# Altium PCB TESTER_REMOTE_01.PcbDoc
Units mil, origin at the board's own origin, x right, y up, seen from the top; angles counter-clockwise.
Board outline 6191.28 x 3341.28 mil, 2 copper layers (Top Layer, Bottom Layer); 126 components, 81 nets, 454 pads, 71 vias.
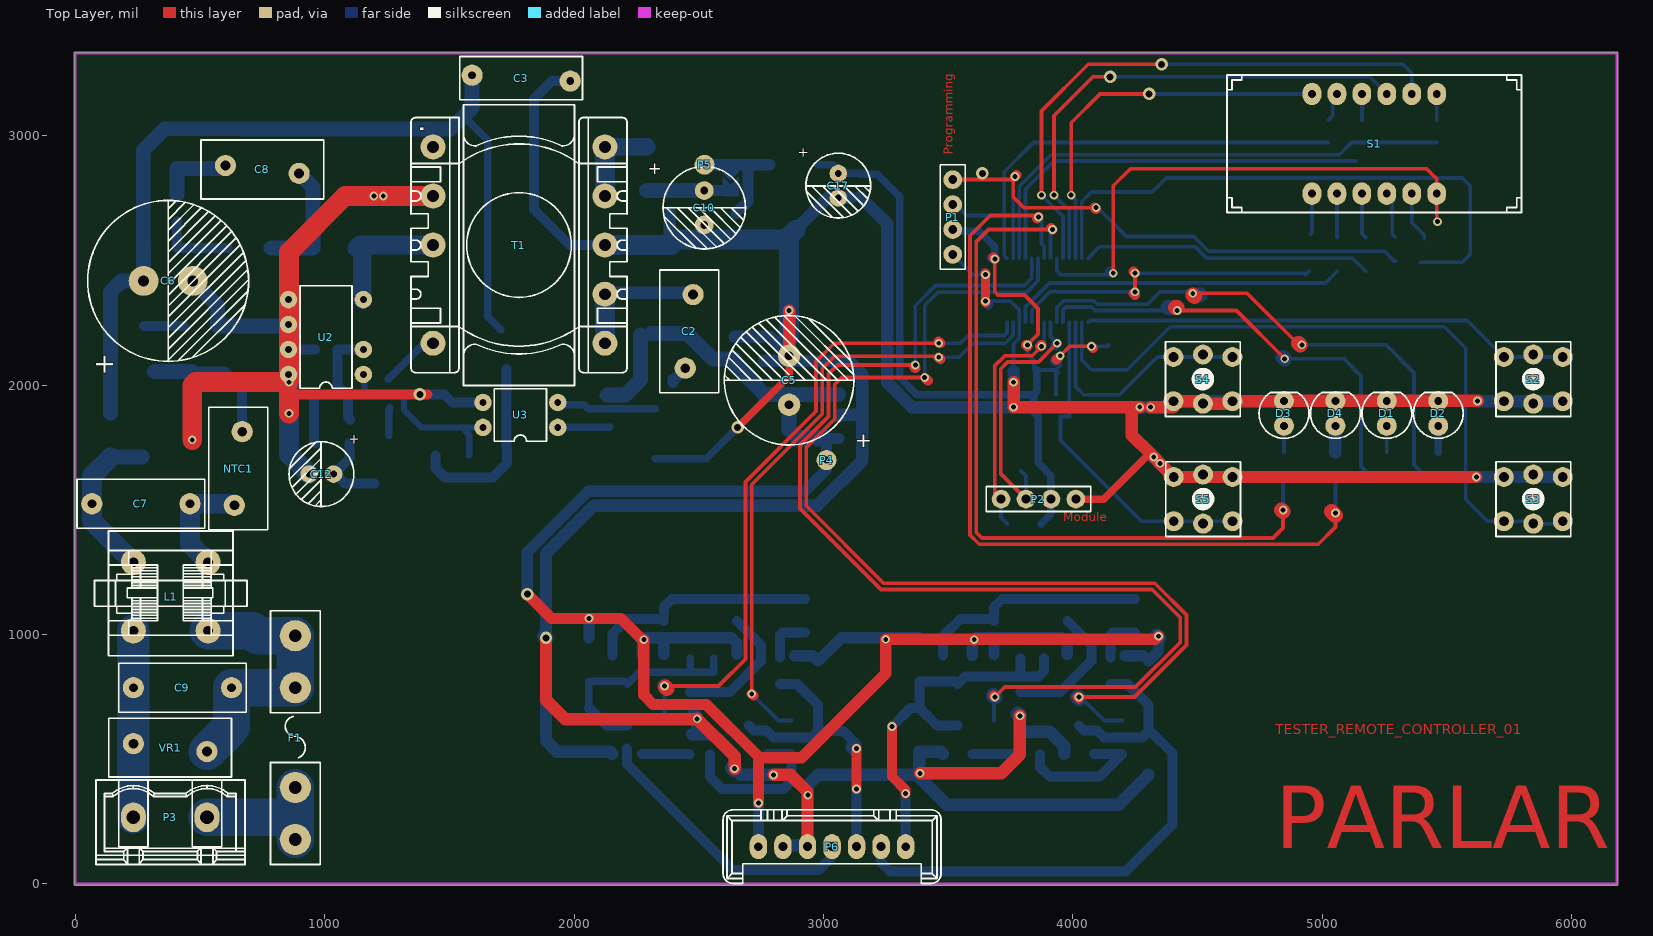
[diagram p0: Top Layer view]
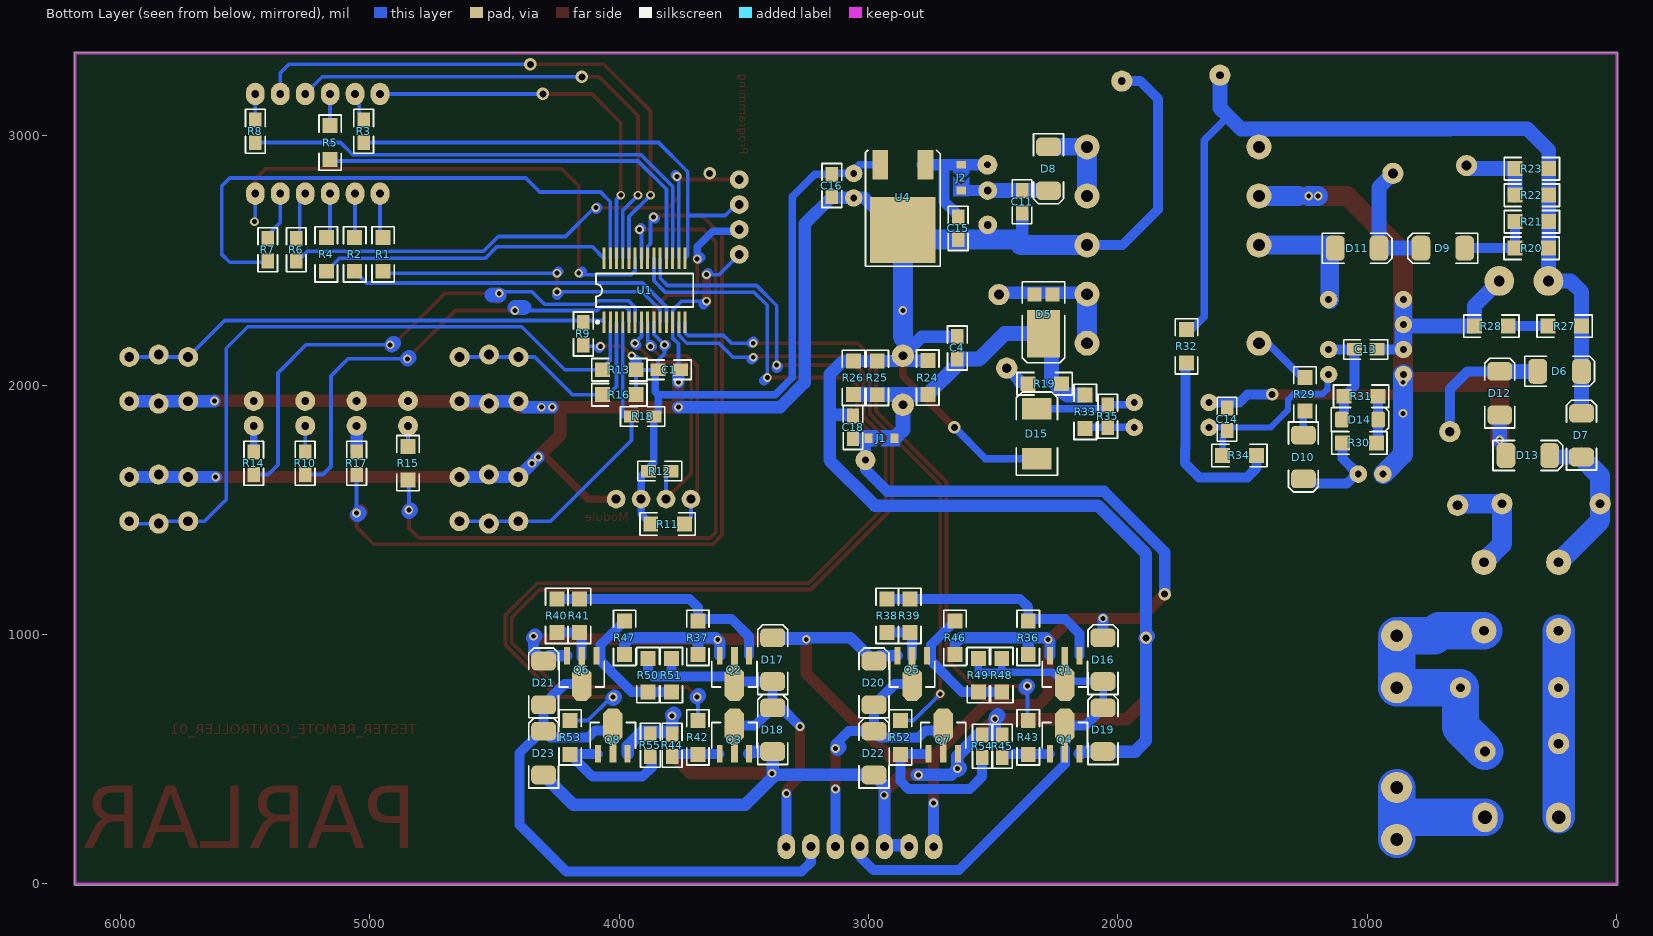
[diagram p1: Bottom Layer view, seen from below]

## Layer stack, top to bottom
Top Solder: solder mask 0.4, Solder Resist, Dk 3.5
Top Layer: signal copper 1.4
Dielectric 1: dielectric 12.6, FR-4, Dk 4.8
Bottom Layer: signal copper 1.4
Bottom Solder: solder mask 0.4, Solder Resist, Dk 3.5

## Board outline
-5.01,0 -5.02,3331.25 cw(c0,3331.25) 0,3336.26 6181.25,3336.26 cw(c6181.25,3331.25) 6186.26,3331.25 6186.27,0 cw(c6181.25,0) 6181.25,-5.01 0,-5.01 cw(c0,0)

## Design rules (kind name [scope] priority, off if disabled: settings)
AssemblyTestPointUsage [All] p1 off:
AssemblyTestpoint [All] p1 off: testpointundercomponent=TRUE minsize=40 maxsize=100 preferedsize=60 minholesize=0 maxholesize=40 preferedholesize=32 testpointgrid=1 usegrid=TRUE gridtolerance=0.01 allowsidetop=TRUE allowsidebottom=TRUE
Clearance Keep [OnLayer('Keep-Out Layer')] p1: gap=10 ignorepadtopadclearanceinfootprint=FALSE except(0: Arc-Hole Track-Hole SMDPad-Hole THPad-Hole Via-Hole Fill-Hole Poly-Hole Region-Hole Text-Hole)
Clearance "OTHER - OTHER" [NOT((InNetClass('220') OR InNetClass('Hline') OR InNetClass('HVDC') OR InNetClass('MV') OR InNet('DCLINK-'))) vs NOT((InNetClass('220') OR InNetClass('Hline') OR InNetClass('HVDC') OR InNetClass('MV') OR InNet('DCLINK-')))] p2: gap=10 ignorepadtopadclearanceinfootprint=FALSE
Clearance "DCL- - OTHER" [InNet('DCLINK-') vs NOT((InNetClass('220') OR InNetClass('Hline') OR InNetClass('HVDC') OR InNetClass('MV') OR InNet('DCLINK-')))] p3: gap=150 ignorepadtopadclearanceinfootprint=FALSE except(0: Arc-Hole Track-Hole SMDPad-Hole THPad-Hole Via-Hole Fill-Hole Poly-Hole Region-Hole Text-Hole)
Clearance MV-OTHER [InNetClass('MV') vs NOT((InNetClass('220') OR InNetClass('Hline') OR InNetClass('HVDC') OR InNetClass('MV') OR InNet('DCLINK-')))] p4: gap=150 ignorepadtopadclearanceinfootprint=FALSE except(0: Arc-Hole Track-Hole SMDPad-Hole THPad-Hole Via-Hole Fill-Hole Poly-Hole Region-Hole Text-Hole)
Clearance MV-DCL- [InNetClass('MV') vs InNet('DCLINK-')] p5: gap=35 ignorepadtopadclearanceinfootprint=FALSE except(0: Arc-Hole Track-Hole SMDPad-Hole THPad-Hole Via-Hole Fill-Hole Poly-Hole Region-Hole Text-Hole)
Clearance MV-MV [InNetClass('MV') vs InNetClass('MV')] p6: gap=25 ignorepadtopadclearanceinfootprint=FALSE except(0: Arc-Hole Track-Hole SMDPad-Hole THPad-Hole Via-Hole Fill-Hole Poly-Hole Region-Hole Text-Hole)
Clearance HLINE-OTHER [InNetClass('Hline') vs NOT((InNetClass('220') OR InNetClass('Hline') OR InNetClass('HVDC') OR InNetClass('MV') OR InNet('DCLINK-')))] p7: gap=150 ignorepadtopadclearanceinfootprint=FALSE except(0: Arc-Hole Track-Hole SMDPad-Hole THPad-Hole Via-Hole Fill-Hole Poly-Hole Region-Hole Text-Hole)
Clearance HLINE-MV [InNetClass('Hline') vs InNetClass('MV')] p8: gap=35 ignorepadtopadclearanceinfootprint=FALSE except(0: Arc-Hole Track-Hole SMDPad-Hole THPad-Hole Via-Hole Fill-Hole Poly-Hole Region-Hole Text-Hole)
Clearance HLINE-HLINE,DCL- [InNetClass('Hline') vs (InNetClass('Hline') OR InNet('DCLINK-'))] p9: gap=25 ignorepadtopadclearanceinfootprint=FALSE except(0: Arc-Hole Track-Hole SMDPad-Hole THPad-Hole Via-Hole Fill-Hole Poly-Hole Region-Hole Text-Hole)
Clearance 220-OTHER [InNetClass('220') vs NOT((InNetClass('220') OR InNetClass('Hline') OR InNetClass('HVDC') OR InNetClass('MV') OR InNet('DCLINK-')))] p10: gap=150 ignorepadtopadclearanceinfootprint=FALSE except(0: Arc-Hole Track-Hole SMDPad-Hole THPad-Hole Via-Hole Fill-Hole Poly-Hole Region-Hole Text-Hole)
Clearance 220-220,HVDC,MV,HLINE [InNetClass('220') vs (InNetClass('220') OR InNetClass('Hline') OR InNetClass('HVDC') OR InNetClass('MV') OR InNet('DCLINK-'))] p11: gap=100 ignorepadtopadclearanceinfootprint=FALSE except(0: Arc-Hole Track-Hole SMDPad-Hole THPad-Hole Via-Hole Fill-Hole Poly-Hole Region-Hole Text-Hole)
Clearance HVDC-OTHER [InNetClass('HVDC') vs NOT(InNetClass('220') OR InNetClass('Hline') OR InNetClass('HVDC') OR InNetClass('MV') OR InNet('DCLINK-'))] p12: gap=150 ignorepadtopadclearanceinfootprint=FALSE except(0: Arc-Hole Track-Hole SMDPad-Hole THPad-Hole Via-Hole Fill-Hole Poly-Hole Region-Hole Text-Hole)
Clearance HVDC-220,HLINE,MV,DCL- [InNetClass('HVDC') vs ((InNetClass('220') OR InNetClass('Hline') OR InNetClass('MV') OR InNet('DCLINK-')))] p13: gap=75 ignorepadtopadclearanceinfootprint=FALSE except(0: Arc-Hole Track-Hole SMDPad-Hole THPad-Hole Via-Hole Fill-Hole Poly-Hole Region-Hole Text-Hole)
Clearance HVDC-HVDC [InNetClass('HVDC') vs InNetClass('HVDC')] p14: gap=60 ignorepadtopadclearanceinfootprint=FALSE except(0: Arc-Hole Track-Hole SMDPad-Hole THPad-Hole Via-Hole Fill-Hole Poly-Hole Region-Hole Text-Hole)
Clearance Clearance_9 [InPolygon] p15: gap=20 ignorepadtopadclearanceinfootprint=FALSE except(0: Arc-Hole Track-Hole SMDPad-Hole THPad-Hole Via-Hole Fill-Hole Poly-Hole Region-Hole Text-Hole)
ComponentClearance [All] p1 off: gap=10 collisioncheckmode=3 verticalgap=10 showdistances=FALSE
FabricationTestPointUsage TestPointUsage [All] p1 off: valid=0 allowmultiple=FALSE
FabricationTestpoint Testpoint [All] p1 off: side=3 testpointundercomponent=TRUE minsize=40 maxsize=100 preferedsize=60 minholesize=0 maxholesize=40 preferedholesize=32 testpointgrid=1 allowsidetop=TRUE allowsidebottom=TRUE usegrid=TRUE gridtolerance=0.01
Height [All] p1 off: minheight=0 maxheight=3937.01 prefheight=500
HoleSize [All] p1 off: absolutevalues=TRUE maxlimit=275.59 minlimit=0 maxpercent=80.000 minpercent=20.000
HoleToHoleClearance [All] p1 off: gap=10 allowstackedmicrovias=TRUE
LayerPairs [All] p1 off: enforce=TRUE
MinimumSolderMaskSliver [All] p1 off: minsoldermaskwidth=10
NetAntennae [All] p1 off: netantennaetolerance=0
PolygonConnect [All] p1: connectstyle=Direct reliefconductorwidth=10 reliefentries=4 polygonreliefangle="90 Angle" airgapwidth=10
RoutingVias [All] p1: holewidth=28 width=50 viastyle="Through Hole" minholewidth=0 minwidth=0 maxholewidth=100 maxwidth=200
SilkToSilkClearance [All] p1 off: silktosilkclearance=10
SilkToSolderMaskClearance [IsPad] p1 off: minsilkscreentomaskgap=10 clearancetoexposedcopper=TRUE
SolderMaskExpansion [All] p1: expansion=4
Width [All] p1: maxlimit=500 minlimit=8 preferedwidth=15
17 further rules are at their usual default settings.

## Classes and differential pairs
net class MV: NetC8_1 NetC8_2 NetD9_1 NetR27_1 NetR32_1
net class HVDC: DCLINK+ DRAIN
net class Hline: BIAS BP/M EN/UV NetD10_1 NetD14_2 NetR29_2
net class 220: NetC7_1 NetC7_2 NetD6_1 NULL PHASE PHASE_IN
component class TESTER_REMOTE_SWITCHING_01: C2 C3 C4 C5 C6 C7 C8 C9 C10 C11 C12 C13 C14 C15 C16 C17 C? D5 D6 D7 D8 D9 D10 D11 D12 D13 D14 D15 D? DZ2 F1 J1 J2 J? L1 NTC1 P3 P4 P5 P7 P8 P10 P11 P12 P? R19 R20 R21 R22 R23 R24 R25 R26 R27 R28 R29 R30 R31 R32 R33 R34 R35 R? SW1 T1 U2 U3 U4 U5 U? VR1
component class TESTER_REMOTE_STEPPER_DRIVER_01: C18 D16 D17 D18 D19 D20 D21 D22 D23 P6 Q1 Q2 Q3 Q4 Q5 Q6 Q7 Q8 R36 R37 R38 R39 R40 R41 R42 R43 R44 R45 R46 R47 R48 R49 R50 R51 R52 R53 R54 R55
component class TESTER_REMOTE_CONTROLLER_01: C1 D1 D2 D3 D4 P1 P2 R1 R2 R3 R4 R5 R6 R7 R8 R9 R10 R11 R12 R13 R14 R15 R16 R17 R18 S1 S2 S3 S4 S5 U1

## Components (designator, comment, footprint, x,y, rotation, side; value= is the part's Value field where it differs from the comment)
C1 "100nF" "SMD 0805" 3800,2062.5 r180 bottom
C2 "27pF-CP-1KV" "VDR D10 P7.5" 2445.93,2068.75 r270 top
C3 "2.2nF-X1Y1-250VAC" "VDR D10 P10" 1984.6,3220.13 r0 top
C4 "100nF" "SMD 0805" 2643.75,2150 r90 bottom
C5 "1000uF-35V" "CAP EL D13 P5" 2862.5,1921.9 r90 top
C6 "22uF-400V" "CAP EL D16 P5" 372.15,2418.75 r0 top
C7 "100nF-MKP-X2-305VAC" "CAP RAD X13 Y5 P10" 459.65,1525 r180 top
C8 "10nF-CP-1KV" "VDR D10 P7.5" 601.87,2881.5 r180 top
C9 "100nF-MKP-X2-305VAC" "CAP RAD X13 Y5 P10" 626.13,787.16 r180 top
C10 "470uF-25V" "CAP EL D08 P3.5" 2522.15,2781.25 r270 top
C11 "100nF" "SMD 0805" 2384.65,2736.25 r270 bottom
C12 "1uF-50V" "CAP EL D06.3 P2.5" 1035.93,1643.75 r180 top
C13 "100nF" "SMD 0805" 1006.25,2143.75 r180 bottom
C14 "1nF" "SMD 0805" 1562.5,1863.75 r90 bottom
C15 "100nF" "SMD 0805" 2640.9,2629.4 r270 bottom
C16 "100nF" "SMD 0805" 3147.15,2801.25 r270 bottom
C17 "100uF-16V" "CAP EL D06.3 P2.5" 3059.65,2850 r270 top
C18 "100nF" "SMD 0805" 3062.5,1831.25 r90 bottom
D1 "LED_BLUE" "LED 5MM" 5259.65,1887.5 r90 top
D2 "LED_RED" "LED 5MM" 5465.9,1887.5 r90 top
D3 "LED_GREEN" "LED 5MM" 4847.15,1887.5 r90 top
D4 "LED_YELLOW" "LED 5MM" 5053.4,1887.5 r90 top
D5 "PDS4150" "SMD POWERDI 5" 2306.66,2276.43 r270 bottom
D6 "1N4007" "SMD SMA" 228.7,2056.25 r180 bottom
D7 "1N4007" "SMD SMA" 140.95,1800.25 r90 bottom
D8 "UF4007" "SMD SMA" 2278.4,2868.5 r270 bottom
D9 "SMAJ150A" "SMD SMA" 697.15,2550 r0 bottom
D10 "UF4007" "SMD SMA" 1256.25,1712.5 r270 bottom
D11 "UF4007" "SMD SMA" 1040.65,2550 r180 bottom
D12 "1N4007" "SMD SMA" 468.66,1968.5 r90 bottom
D13 "1N4007" "SMD SMA" 355.91,1718.75 r180 bottom
D14 "1N5255B-28V" "SMD MINIMELF SOD80" 1029.25,1862.5 r180 bottom
D15 "ZM4748A-22V" "SMD DO-41" 2325,1806.25 r90 bottom
D16 "UF4007" "SMD SMA" 2059.65,900 r90 bottom
D17 "UF4007" "SMD SMA" 3384.65,900 r90 bottom
D18 "UF4007" "SMD SMA" 3384.65,619 r90 bottom
D19 "UF4007" "SMD SMA" 2059.65,619 r90 bottom
D20 "UF4007" "SMD SMA" 2978.4,806.25 r90 bottom
D21 "UF4007" "SMD SMA" 4303.4,806.25 r90 bottom
D22 "UF4007" "SMD SMA" 2978.4,525 r90 bottom
D23 "UF4007" "SMD SMA" 4303.4,525 r90 bottom
F1 "FUSE 3.15A-250V-FAST" "FUSE P5.3MM H1.3MM" 882.04,178.49 r90 top
J1 "JUNCTION PAD" "PAD JUNCTION" 2896.6,1787.7 r0 bottom
J2 "JUNCTION PAD" "PAD JUNCTION" 2628.4,2781.25 r90 bottom
L1 "?" "CH CCSP" 532.43,1015.5 r90 top
NTC1 "10R11MM" "VDR D10 P7.5" 637.5,1518.75 r270 top
P1 "CON PIN HEADER 1*40" "CON HDR 2.54FM 4" 3518.75,2525 r90 top
P2 "I2C_MODUlE" "CON HDR 2.54FM 4" 3712.5,1543.75 r0 top
P3 "PHONIX_WF855-7.62" "CON PHOENIX2 7.5 2" 527.71,267.47 r180 top
P4 "CONNECTOR 1" "PAD TEST"#1 3012.5,1700 r0 top
P5 "CONNECTOR 1" "PAD TEST"#2 2523.28,2888.39 r0 top
P6 "CONNECTOR_MKS_1857" "CON MKS1857 7" 3329.92,150 r180 top
Q1 "BCX52" "SMD SOT89 TRANSISTOR" 2213.09,858.81 r0 bottom
Q2 "BCX52" "SMD SOT89 TRANSISTOR" 3538.09,858.81 r0 bottom
Q3 "BCX55" "SMD SOT89 TRANSISTOR" 3538.09,579.19 r180 bottom
Q4 "BCX55" "SMD SOT89 TRANSISTOR" 2213.09,579.19 r180 bottom
Q5 "BCX52" "SMD SOT89 TRANSISTOR" 2825.59,858.56 r0 bottom
Q6 "BCX52" "SMD SOT89 TRANSISTOR" 4150.59,858.56 r0 bottom
Q7 "BCX55" "SMD SOT89 TRANSISTOR" 2700.59,578.94 r180 bottom
Q8 "BCX55" "SMD SOT89 TRANSISTOR" 4025.59,578.94 r180 bottom
R1 "330R" "SMD 1206" 4947.15,2525 r90 bottom
R2 "330R" "SMD 1206" 5061.21,2525 r90 bottom
R3 "330R" "SMD 0805" 5025,3018.75 r270 bottom
R4 "330R" "SMD 1206" 5175,2525 r90 bottom
R5 "330R" "SMD 1206" 5159.65,2973.75 r270 bottom
R6 "330R" "SMD 0805" 5295.59,2543.75 r90 bottom
R7 "330R" "SMD 0805" 5409.65,2543.75 r90 bottom
R8 "330R" "SMD 0805" 5459.65,3018.75 r270 bottom
R9 "10K" "SMD 0805" 4143.75,2206.25 r270 bottom
R10 "330R" "SMD 0805" 5259.65,1687.5 r90 bottom
R11 "10K" "SMD 1206" 3806.25,1443.75 r0 bottom
R12 "10K" "SMD 0805" 3837.5,1656.25 r0 bottom
R13 "10K" "SMD 1206" 4000,2062.5 r180 bottom
R14 "330R" "SMD 0805" 5465.9,1687.5 r90 bottom
R15 "330R" "SMD 1206" 4847.15,1687.5 r90 bottom
R16 "10K" "SMD 1206" 4000,1962.5 r180 bottom
R17 "330R" "SMD 0805" 5053.4,1687.5 r90 bottom
R18 "10K" "SMD 0805" 3906.25,1875 r180 bottom
R19 "390R" "SMD 1206" 2293.75,2006.25 r180 bottom
R20 "2.2K" "SMD 1206" 340.9,2550 r180 bottom
R21 "2.2K" "SMD 1206" 339.65,2656.25 r180 bottom
R22 "200R" "SMD 1206" 339.65,2762.5 r180 bottom
R23 "200R" "SMD 1206" 339.65,2868.75 r180 bottom
R24 "6.34K" "SMD 1206" 2762.5,2031.25 r90 bottom
R25 "6.34K" "SMD 1206" 2965.35,2029.75 r90 bottom
R26 "6.34K" "SMD 1206" 3060.8,2030 r90 bottom
R27 "470K" "SMD 1206" 208.45,2237.5 r180 bottom
R28 "470K" "SMD 1206" 502.15,2237.5 r180 bottom
R29 "47R" "SMD 1206" 1250,1963.75 r90 bottom
R30 "47R" "SMD 1206" 1031.25,1768.75 r180 bottom
R31 "21K-1%" "SMD 1206" 1025,1956.25 r0 bottom
R32 "4.3M" "SMD 1206" 1725,2156.25 r90 bottom
R33 "680R" "SMD 1206" 2131.25,1893.75 r90 bottom
R34 "3.9M" "SMD 1206" 1512.5,1718.75 r180 bottom
R35 "1K" "SMD 0805" 2040.9,1876.25 r270 bottom
R36 "10K" "SMD 1206" 2359.65,987.5 r270 bottom
R37 "10K" "SMD 1206" 3684.65,987.5 r270 bottom
R38 "1K" "SMD 1206" 2925.59,1075.25 r90 bottom
R39 "1K" "SMD 1206" 2834.65,1075.25 r90 bottom
R40 "1K" "SMD 1206" 4250.59,1075.25 r90 bottom
R41 "1K" "SMD 1206" 4159.65,1075.25 r90 bottom
R42 "330R" "SMD 1206" 3684.65,587.75 r90 bottom
R43 "330R" "SMD 1206" 2359.65,587.75 r90 bottom
R44 "10K" "SMD 0805" 3788.14,556.25 r270 bottom
R45 "10K" "SMD 0805" 2463.14,552.75 r270 bottom
R46 "10K" "SMD 1206" 2653.4,987.5 r270 bottom
R47 "10K" "SMD 1206" 3978.4,987.5 r270 bottom
R48 "1K" "SMD 1206" 2465.9,837.75 r270 bottom
R49 "1K" "SMD 1206" 2559.65,837.75 r270 bottom
R50 "1K" "SMD 1206" 3884.65,837.75 r270 bottom
R51 "1K" "SMD 1206" 3790.9,837.75 r270 bottom
R52 "330R" "SMD 1206" 2872.15,587.75 r90 bottom
R53 "330R" "SMD 1206" 4197.15,587.75 r90 bottom
R54 "10K" "SMD 0805" 2544.39,552.75 r270 bottom
R55 "10K" "SMD 0805" 3875,556.25 r270 bottom
S1 "7SEG_K_4DIG_39*14MM" "SEVEN SEG K 12 PIN 4DIGIT RED X:30MM Y:14MM" 5209.65,2968.75 r0 top
S2 "SWITCH PUSH" "SW 6X6" 5847.15,2025 r270 top
S3 "SWITCH PUSH" "SW 6X6" 5847.15,1543.75 r90 top
S4 "SWITCH PUSH" "SW 6X6" 4522.15,2025 r270 top
S5 "SWITCH PUSH" "SW 6X6" 4522.94,1543.75 r90 top
T1 "TRANS SD36" "TR EC28/20 VER 5+5" 1434.65,2956.25 r270 top
U1 "BS66F340C" "SMD IC SSOP28-HOLTEK" 3898.48,2381.25 r180 bottom
U2 "TNY274" DIP8 1154.83,2043.75 r90 top
U3 "PC817A-GN" DIP4 1934.65,1831.25 r90 top
U4 "78L05" "SMD DPAK" 2862.7,2753.74 r0 bottom
VR1 "VDR-10D471" "VDR D10 P7.5" 232.43,562.75 r180 top

## Footprints (in the part's own frame and the unit in brackets; to place one, negate y for a bottom-side part, rotate by r counter-clockwise, add the part's x,y. Pads: shape width x height; smd on the part's side, far side on the other; paste and mask are expansions set on the pad)
"CAP EL D06.3 P2.5" [mil] "PITCH:2.5MM D:6.3MM"
  round 70 hole 27.56: 1(0,0) 2(98.43,0)
  silkscreen extent -81,-130 179,130, body extent -83,-134 185,134, height 492
"CAP EL D08 P3.5" [mm] "PITCH:3.5MM D:8MM"
  round 1.905 hole 0.8: 1(0,0) 2(3.5,0)
  silkscreen extent -2.45,-4.2 5.95,4.2, body extent -2.5,-4.32 6,4.17, height 17.5
"CAP EL D13 P5" [mil] "PITCH:5MM D:13MM"
  round 90 hole 35.43: 1(0,0) 2(196.85,0)
  silkscreen extent -161,-260 358,260, body extent -157,-256 354,256, height 1063
"CAP EL D16 P5" [mil] "PITCH:7.5MM D:16MM"
  round 120 hole 43.31: 1(-98.43,0) 2(98.43,0)
  silkscreen extent -323,-323 323,323, body extent -326,-324 324,326, height 1030
"CAP RAD X13 Y5 P10" [mil] "X:13MM Y:5MM PITCH:10MM H:12MM"
  round 85 hole 35.43: 1(0,0) 2(393.7,0)
  silkscreen extent -59,-98 453,98, body extent -59,-101 453,96, height 453
"CH CCSP" [mm] "LINE FILTER"
  oval 2.6x2.54 hole 1: 1(0,0) 2(6.985,0) 3(0,7.62) 4(6.985,7.62)
  silkscreen extent -2.54,-3.97 10.16,11.59, body extent -1.97,-3.79 8.73,11.91, height 19.8
"CON HDR 2.54FM 4" [mm] "CONNECTOR PTCH:2.54MM"
  round 1.905 hole 0.9: 1(0,0) 2(2.54,0) 3(5.08,0) 4(7.62,0)
  silkscreen extent -1.52,-1.27 9.14,1.27, body extent -1.5,-1.24 9.16,1.26, height 5
"CON MKS1857 7" [mm] "CONNECTOR PITCH:2.5MM"
  oval 1.778x2.54 hole 0.85: 1(0,0) 7(15,0)
  oval 1.778x2.54 hole 0.9: 2(2.5,0) 3(5,0) 4(7.5,0) 5(10,0) 6(12.5,0)
  silkscreen extent -3.6,-3.75 18.6,3.75, body extent -3.6,-3.71 18.6,3.8, height 23.3
"CON PHOENIX2 7.5 2" [mm] "CONNECTOR PITCH:7.5MM"
  oval 2.54x3.048 hole 1.4: 1(0,0) 2(7.5,0)
  silkscreen extent -3.87,-3.8 11.32,4.8, body extent -3.89,-3.75 11.35,4.85, height 12
DIP4 [mil] "DIP4"
  round 70 hole 27.56: 1(0,0) 2(100,0) 3(100,300) 4(0,300)
  silkscreen extent -56,46 156,254, body extent -59,-7 159,307, height 170
DIP8 [mil] "DIP8"
  round 70 hole 27.56: 1(0,0) 2(100,0) 4(300,0) 5(300,300) 6(200,300) 7(100,300) 8(0,300)
  silkscreen extent -56,46 356,254, body extent -65,-5 365,305, height 200
"FUSE P5.3MM H1.3MM" [mm] "FUSE"
  round 3.175 hole 1.3: 1(0,0) 1(5.3,0) 2(15.46,0) 2(20.76,0)
  silkscreen extent -2.54,-2.54 23.3,2.54, body extent -0.64,-3.99 21.36,4.01, height 13.9
"LED 5MM" [mil] "LED"
  round 80 hole 31.5: 1(-50,0) 2(50,0)
  silkscreen extent -100,-100 84,100
"PAD JUNCTION" [mm] "PAD JUNCTION"
  rect 0.8x1 smd: 1(0,0) 2(2.626,0.005)
  Top Layer region: -0.564,0.818 1.41,0.818 0.592,-0.001 1.424,-0.833 -0.564,-0.833
  Top Layer region: 1.007,-0.039 1.859,0.813 3.195,0.813 3.195,-0.808 1.776,-0.808
"PAD TEST"#1 [mil] "PAD TEST"
  round 80 hole 27.56: 1(0,0)
"PAD TEST"#2 [mil] "PAD TEST"
  round 80 hole 27.56: 1(0,-3.74)
"SEVEN SEG K 12 PIN 4DIGIT RED X:30MM Y:14MM" [mil] "SEVEN SEG K 12 PIN 4DIGIT RED X:30MM Y:14MM"
  oval 75x90 hole 31.5: 1(-250,200) 2(-150,200) 3(-50,200) 4(50,200) 5(150,200) 6(250,200) 7(250,-200) 8(150,-200) 9(50,-200) 10(-50,-200) 11(-150,-200) 12(-250,-200)
  silkscreen extent -591,-276 591,276, body extent -591,-276 591,276, height 284
"SMD 0805" [mil] "SMD 0805"
  round 27.56 on Mech2: 0(0,0)
  rect 60x50 smd: 1(-45,0) 2(45,0)
  silkscreen extent -88,-39 88,39, body extent -57,-28 61,27, height 21
"SMD 1206" [mil] "SMD 1206"
  round 27.56 on Mech2: 0(0,0)
  rect 60x60 smd: 1(-67.5,0) 2(67.5,0)
  silkscreen extent -111,-45 111,45, body extent -66,-34 66,34, height 33
"SMD DO-41" [mm] "SMD DO-41"
  round 2 on Mech2: 0(0,0)
  rect 2.2x3 smd: 1(-2.54,0) 2(2.54,0)
  silkscreen extent -4.24,-2.11 4.24,2.11, body extent -2.4,-1.3 2.4,1.3, height 2.6
"SMD DPAK" [mm] "SMD DPAK"
  round 1.2 on Mech2: 0(-2.3,-0.925) 0(0,-1.175) 0(2.3,-0.925)
  rect 1.6x3 smd: 1(-2.3,-3.325) 3(2.3,-3.325)
  rect 6.7x6.7 smd: 2(0,3.325)
  silkscreen extent -3.81,-4.8 3.81,7.01, body extent -3.23,-3.59 3.27,5.11, height 2.3
"SMD IC SSOP28-HOLTEK" [mm] "SSOP, 28-Leads , Pitch 0.635mm"
  oval 1x3 on Mech2: 0(-4.522,0) 0(4.522,0)
  rect 0.3x2.2 smd: 1(-4.127,-3.25) 2(-3.492,-3.25) 3(-2.857,-3.25) 4(-2.222,-3.25) 5(-1.587,-3.25) 6(-0.952,-3.25) 7(-0.317,-3.25) 8(0.318,-3.25) 9(0.953,-3.25) 10(1.588,-3.25) 11(2.223,-3.25) 12(2.858,-3.25) 13(3.493,-3.25) 14(4.128,-3.25) 15(4.128,3.25) 16(3.493,3.25) 17(2.858,3.25) 18(2.223,3.25) 19(1.588,3.25) 20(0.953,3.25) 21(0.318,3.25) 22(-0.317,3.25) 23(-0.952,3.25) 24(-1.587,3.25) 25(-2.222,3.25) 26(-2.857,3.25) 27(-3.492,3.25) 28(-4.127,3.25)
  round 1.5 on Mech2: 3(-2.261,0) 3(0,0) 3(2.261,0)
  silkscreen extent -4.95,-3.37 4.95,1.7, body extent -4.95,-3.04 4.95,2.96, height 1.75
"SMD MINIMELF SOD80" [mil] "SMD MINI MELF"
  round 51.18 on Mech2: 0(0,0)
  rrect30% 54x64 smd: 1(-73,0) 2(73,0)
  silkscreen extent -116,-47 116,47, body extent -68,-30 74,30, height 59
"SMD POWERDI 5" [mm] "SMD POWERDI 5"
  round 0.8 on Mech2: 0(-1.095,-0.711) 0(-1.095,1.129)
  rect 1.4x1.39 smd: 1(-2.225,-0.711) 1(-2.225,1.129)
  rect 4.86x3.36 smd: 2(1.757,0.209)
  silkscreen extent -3.53,-1.97 4.72,2.38, body extent -2.82,-1.8 3.78,2.25, height 1.17
"SMD SMA" [mm] "SMD SMA"
  round 2 on Mech2: 0(0,0)
  rrect50% 1.905x2.54 smd: 1(-2.229,0) 2(2.229,0)
  silkscreen extent -3.56,-1.52 3.56,1.52, body extent -2.8,-1.48 2.8,1.47, height 2.7
"SMD SOT89 TRANSISTOR" [mm] "SMD SOT89"
  round 0.8 on Mech2: 0(-1.5,-0.1) 0(1.5,-0.1)
  rect 0.6x1.8 smd: 1(-1.5,-1.45) 2(1.5,-1.45)
  rect 0.7x2.2 smd: 3(0,-1.25)
  oct 2x3.4 smd: 3(0,1.45)
  silkscreen extent -2.3,-0.85 2.3,1.75, body extent -2.29,-1.72 2.31,2.48, height 1.55
"SW 6X6" [mm] "SWITCH"
  round 2.032 hole 1: 1(-2.5,0) 1(-2.25,3) 1(-2.25,-3) 2(2.25,3) 2(2.25,-3) 2(2.5,0)
  silkscreen extent -3.81,-3.81 3.81,3.81, body extent -3.05,-4.17 2.95,4.19, height 9
"TR EC28/20 VER 5+5" [mm] "transformer"
  round 2.54 hole 1.2: 1(0,0) 2(5,0) 3(10,0) 5(20,0) 6(20,17.5) 7(15,17.5) 8(10,17.5) 9(5,17.5) 10(0,17.5)
  silkscreen extent -4.3,-2.25 24.3,19.75, body extent -4.29,-2.21 24.31,19.79, height 21
"VDR D10 P7.5" [mil] "voltage-dependent resistor"
  round 85 hole 39.37: 1(0,0) 2(-295.28,31.5)
  silkscreen extent -394,-102 98,134, body extent -394,-103 98,133, height 522
"VDR D10 P10" [mil] "voltage-dependent resistor"
  round 85 hole 31.5: 1(0,0) 2(-393.7,23.62)
  silkscreen extent -443,-75 49,98, body extent -443,-75 49,99, height 522

## Part data
C1 C2 C3 C4 C7 C8 C9 C11 C13 C14 C15 C16 C18: library part CAP, "Capacitor", LatestRevisionDate=17-Jul-2002, LatestRevisionNote="Re-released for DXP Platform.", PackageDescription="Radial Cap, Thru-Hole; 2 Leads; 0.3 in Pin Spacing", PackageReference=RAD-0.3, Published=8-Jun-2000, Publisher="Altium Limited"
C5 C6 C10 C12 C17: library part "CAP POL", "Capacitor  Polarized", PackageDescription="Capacitor; 2 Leads", PackageReference=CAPR5-4X5, Published=23-Sep-2002, Publisher="Altium Limited"
D1 D2 D3 D4: library part LED, "Typical INFRARED GaAs LED", LatestRevisionDate=08-Jul-2005, LatestRevisionNote="Mech Layer 1 removed.", PackageDescription="LED; 2 Leads", PackageReference=LED-0, Published=8-Jun-2000, Publisher="Altium Limited"
D5: library part "DIODE SCHOTTKY", "Schottky Diode"
D6 D7 D8 D10 D11 D12 D13 D16 D17 D18 D19 D20 D21 D22 D23: library part DIODE, "Typical Diode"
D9 D14 D15: library part "DIODE ZENER", "Zener Diode"
F1: library part FUSE, "Fuse", LatestRevisionDate=17-Jul-2002, LatestRevisionNote="Re-released for DXP Platform.", PackageDescription="Thru-Hole; 2 Leads", PackageReference=PIN-W2/E2.8, Published=8-Jun-2000, Publisher="Altium Limited"
J1 J2: library part "RES JUNCTION", "Resistor", LatestRevisionDate=17-Jul-2002, LatestRevisionNote="Re-released for DXP Platform.", PackageDescription="Axial Device, Thru-Hole; 2 Leads; 0.4 in Pin Spacing", PackageReference=AXIAL-0.4, Published=8-Jun-2000, Publisher="Altium Limited"
L1: library part "EMI FILTER"
NTC1: library part "RES VARISTOR", "Varistor (Voltage-Sensitive Resistor)", Code_IPC=RESC2012, LatestRevisionDate=29-May-2009, LatestRevisionNote="IPC-7351 Footprint Added.", PackageDescription="Chip Resistor 0805 Case Size", PackageReference=6-0805, PackageVersion=Mar-2003, Published=24-Mar-1999, Publisher="Altium Limited"
P1 P2: library part "CONNECTOR 4", "Header, 4-Pin", LatestRevisionDate=17-Jul-2002, LatestRevisionNote="Re-released for DXP Platform.", Publisher="Altium Limited"
P3: library part "CONNECTOR 2", "Header, 2-Pin", LatestRevisionDate=17-Jul-2002, LatestRevisionNote="Re-released for DXP Platform.", Publisher="Altium Limited"
P4 P5: "The BS81x is a series of 2~16 key touch key devices", LatestRevisionDate=17-Jul-2002, LatestRevisionNote="Re-released for DXP Platform.", Publisher="Altium Limited"
P6: library part "CONNECTOR 7", "Header, 7-Pin", LatestRevisionDate=17-Jul-2002, LatestRevisionNote="Re-released for DXP Platform.", Publisher="Altium Limited"
Q1 Q2 Q5 Q6: library part "Q PNP", "PNP Bipolar Transistor", LatestRevisionDate=29-May-2009, LatestRevisionNote="IPC-7351 Footprint Added.", PackageDescription="3-Pin SOT-23 Package 0.95 mm Pitch, 2.4 mm Lead Span", PackageReference=SOT-23B, PackageVersion=Aug-1999, Published=8-Jun-2000, Publisher="Altium Limited"
Q3 Q4 Q7 Q8: library part "Q NPN", "NPN Bipolar Transistor", Code_JEDEC=TO-226-AA, LatestRevisionDate=17-Jul-2002, LatestRevisionNote="Re-released for DXP Platform.", PackageDescription="TO, Flat Index; 3 In-Line, Axial Leads; Body Dia. 4.8mm; Leads 0.55 x 0.51 mm (max)", PackageReference=TO-226-AA, Published=8-Jun-2000, Publisher="Altium Limited"
R1 R2 R3 R4 R5 R6 R7 R8 R9 R10 R11 R12 R13 R14 R15 R16 R17 R18 R19 R20 R21 R22 R23 R24 R25 R26 R27 R28 R29 R30 R31 R32 R33 R34 R35 R36 R37 R38 R39 R40 R41 R42 R43 R44 R45 R46 R47 R48 R49 R50 R51 R52 R53 R54 R55: library part RES, "Resistor"
S1: library part "7 SEG 4DIG"
S2 S3 S4 S5: "Switch", LatestRevisionDate=17-Jul-2002, LatestRevisionNote="Re-released for DXP Platform.", PackageDescription="Switch; 2 Leads", PackageReference=SPST-2, Published=24-Mar-1999, Publisher="Altium Limited"
T1: "Transformer"
U1: library part "IC BS66F340C", "Enhanced Touch A/D Flash MCU, 28-Pin"
U2: library part "IC TNY274", "AC to DC Switching Converter Off-Line Switcher 140kHz, 7-Pin"
U3: library part "OPTO COPLER", "4-Pin Phototransistor Optocoupler", DatasheetVersion=Nov-2003, LatestRevisionDate=04-Mar-2005, LatestRevisionNote="Sch pins 3 & 4 Swapped.", PackageReference=DIP-4, Published=24-Mar-1999, Publisher="Altium Limited"
U4: library part "VOLT REG", "Voltage Regulator", LatestRevisionDate=29-May-2009, LatestRevisionNote="IPC-7351 Footprint Added.", PackageDescription="3-Pin Transistor Outline Package 2.54 mm Pitch, 15.1 mm Lead Span", PackageReference=D2PAK, Published=24-Mar-1999, Publisher="Altium Limited"
VR1: library part VDR, "Typical VDR"

## Via types
v1: diameter 35, hole 19.68, Top Layer to Bottom Layer, 63 vias
v2: diameter 50, hole 28, Top Layer to Bottom Layer, 8 vias

## Nets (pads, with @x,y where several pads share a name; then routed paths per layer and width w, separated by ;. In a path a pad name is that pad's centre, name@x,y a point inside that pad or via, vN(x,y) a via of type N, cw(c..) or ccw(c..) an arc to the next point about the centre after c; other vN are vias at no path point)
BIAS: C12.1 D10.2 R30.1 | length 328.1
  Bottom Layer w40: C12.1 C12.1@1039.84,1647.66 ; R30.1 1098.75,1706.57 C12.1@1039.84,1647.66 ; 1199.75,1606.25 1081.25,1606.25 C12.1@1039.84,1647.66
BP/M: C13.1 D14.1 R31.2 U2.2 | length 406
  Bottom Layer w40: D14.1 1092.5,1872.25 R31.2 1051.25,1997.5 C13.1 U2.2
DCLINK+: C3.2 C6.1 D6.2 D7.2 R20.2 R21.2 R22.2 R23.2 R27.2 R32.2 T1.1 | length 3766.9
  Bottom Layer w30: 1557.95,3079.55 1654.65,2982.85 1654.65,2275.35 R32.2@1706.25,2223.75
  Bottom Layer w60: D7.2 D6.2 140.95,2237.5 140.95,2375.05 184.65,2418.75 C6.1 C6.1@273.4,2419.08 ; C6.1@272.15,2420.32 C6.1@273.4,2419.08 ; 668.75,3028.75 1434.65,3028.75 1438.4,3028.75 ; 759.65,3028.75 759.65,3029 358.9,3029 272.15,2942.24 R23.2 R22.2 R21.2 272.15,2551.25 R20.2 C6.1@273.4,2419.08 ; T1.1 1434.65,3025 1438.4,3028.75 ; C3.2 1590.9,3112.5 1557.95,3079.55 1507.15,3028.75 1438.4,3028.75
DCLINK-: C6.2 C12.2 C13.2 C14.2 D12.1 D13.1 R28.1 T1.2 U2.5 U2.6 U2.7 U2.8 U3.3 | length 4244.9
  Top Layer w40: 856.25,1963.75 v2(1381.25,1963.75) 1412.5,1963.75
  Top Layer w80: v1(468.66,1781.25) 468.66,1999.91 481.25,2012.5 v1(856.25,2012.5) 856.25,2534.1 1081.55,2759.4 v1(1197.15,2759.4) v1(1234.65,2759.4) T1.2 ; v1(856.25,1887.5) 856.25,1963.75
  Bottom Layer w40: U2.7@856.25,2143.75 C13.2 ; v2(1381.25,1963.75) 1480,1963.75 1512.5,1931.25 U3.3
  Bottom Layer w60: v1(468.66,1781.25) D12.1 ; C6.2 569.65,2319.68 R28.1 U2.6@856.25,2237.5
  Bottom Layer w70: U2.7@856.25,2143.75 856.25,2237.5 U2.5@856.25,2343.75
  Bottom Layer w80: U2.8 856.25,2042.33 v1(856.25,2012.5) v1(856.25,1887.5) 856.25,1723.43 C12.2@935.93,1643.75 ; v1(1197.15,2759.4) v1(1234.65,2759.4) ; 1278.4,2759.4 T1.2
DRAIN: D11.1 T1.3 U2.4 | length 539.3
  Bottom Layer w75: U2.4@1150,2343.75 1150,2550 D11.1 1140.95,2562.55 T1.3
EN/UV: C14.1 R34.1 U2.1 U3.4 | length 731
  Bottom Layer w25: U2.1 1160,2038.58 1160,1983.75 1180,1963.75 1295.53,1963.75 1317.5,1941.78 1317.5,1901.25 1387.5,1831.25 U3.4 ; C14.1 1580,1801.25 R34.1
GND: C1.2 C3.1 C4.2 C5.2 C10.2 C11.2 C15.2 C16.2 C17.2 C18.2 D1.2 D2.2 D3.2 D4.2 D15.1 D18.1 D19.1 D22.1 D23.1 P1.1 P2.4 P6.5 P6.6 Q3.2 Q4.2 Q7.2 Q8.2 R24.2 R25.2 R26.2 R44.1 R45.1 R54.1 R55.1 S2.2 S3.2 S4.2 S5.2 T1.8 U1.12 U4.2 | length 19510.6
  Top Layer w15: v1@3650,2442.19 v1(3650,2443.75)
  Top Layer w30: v2(2656.25,1831.25) 2862.5,2037.5 C5.2 ; P2.4 4125,1543.75 4309.2,1727.95
  Top Layer w35: v1(3650,2337.5) v1@3650,2442.19
  Top Layer w40: v1@3650,2331.25 v1(3650,2337.5) ; v1(3650,2443.75) v1@3650,2448.44
  Top Layer w50: v2(1887.5,987.5) 1887.5,737.5 1963.75,661.25 2492.5,661.25 v1(2493.75,662.5) 2643.75,512.5 v1(2643.75,462.5) ; v1(2800,437.5) 2868.75,437.5 2936.22,370.03 P6.5@2936.22,187.5 ; C5.2 v1(2862.5,2299.8) ; v1(3387.5,443.75) 3712.5,443.75 3788.14,519.39 v1(3788.14,674.36) ; v1(3762.5,2012.5) v1(3762.5,1912.5) 4237.5,1912.5 ; v1(4268.75,1912.5) 4237.5,1912.5 ; v1(4312.5,1912.5) S4.2@4404.04,1912.5 ; S4.2@4404.04,1936.42 4512.31,1936.42 4522.15,1926.57 4630.42,1926.57 4640.26,1936.42 4846.07,1936.42 D3.2 D4.2 D1.2 D2.2 v1(5623.75,1937.5) ; v1(5618.75,1632.33) 4641.05,1632.33 4404.83,1632.33 v1(4350,1687.16) v1(4325,1712.16) 4309.2,1727.95 4237.5,1799.66 4237.5,1912.5
  Bottom Layer w15: P1.1@3521.87,2521.88 3600,2443.75 v1(3650,2443.75) ; v1(3650,2337.5) 3750.74,2337.5 3785.98,2302.26 U1.12 3785.98,2190.27 3762.5,2166.79 C1.2@3762.5,2056.25
  Bottom Layer w30: D15.1 2531.25,1706.25 v2(2656.25,1831.25)
  Bottom Layer w40: C3.1 1910.49,3220.13 1839.65,3149.29 1839.65,2705.19 1982.29,2562.55 T1.8 ; v1@3643.75,2450 v1(3650,2443.75) ; v1@3656.25,2331.25 3662.5,2325
  Bottom Layer w50: Q4.2 2144.89,531.25 D19.1 1931.25,531.25 1887.5,575 v2(1887.5,987.5) 1887.5,1324.93 2080.07,1517.5 2975,1517.5 3156.25,1698.75 3156.25,1900 ; 2384.65,2581.25 C11.2 ; R45.1@2473.39,600 2556.64,600 2643.75,512.89 v1@2643.75,475 ; 2493.75,620.36 v1(2493.75,662.5) ; v1(2643.75,462.5) 2668.75,437.5 v1(2800,437.5) v1@2806.87,437.5 ; C4.2 2786.25,2195 C5.2 ; R24.2 2842.5,2098.75 C5.2 ; P6.6@2837.8,156.25 2936.22,156.25 2936.22,395.07 D22.1 v1@3375.3,437.25 ; v1(2862.5,2299.8) 2862.5,2194.15 2862.7,2193.95 2862.5,2193.75 C5.2 ; U4.2@2887.7,2622.84 3016.44,2751.57 C17.2 3111.22,2751.57 ; C18.2 3067.5,1881.25 3137.5,1881.25 3156.25,1900 ; C16.2 3256.25,2647.15 3256.25,2010.54 3354.29,1912.5 v1(3762.5,1912.5) ; Q3.2 3469.89,531.25 D18.1 3384.65,446.6 v1@3375.3,437.25 ; v1(3762.5,2012.5) C1.2@3762.5,2056.25 ; v1(3788.14,674.36) 3788.14,610.25 3908.5,610.25 3966.54,552.21 Q8.2 ; v1(4268.75,1912.5) v1(4312.5,1912.5) 4380.12,1912.5 4404.04,1936.42 S4.2@4640.26,1936.42 ; D23.1 4184.9,318.75 3493.8,318.75 v1@3375.3,437.25 ; v1(4325,1712.16) v1(4350,1687.16) 4404.83,1632.33 S5.2@4641.05,1632.33 ; v1(5618.75,1632.33) 5729.04,1632.33 S3.2@5965.26,1632.33 ; v1(5623.75,1937.5) 5624.83,1936.42 5729.04,1936.42 S2.2@5965.26,1936.42 ; C5.2 2883.75,2097.5 R26.2 3102.5,2097.5 3156.25,2043.75 3156.25,1900
  Bottom Layer w60: v2@1881.25,993.75 v2(1887.5,987.5) ; 2481.25,675 v1@2487.5,668.75 ; v1@2634.38,465.62 v1@2640.62,459.38 ; v1@3781.25,681.25 v1@3787.5,675
  Bottom Layer w80: T1.8 2390.95,2562.55 2412.8,2584.4 2849.26,2584.4 U4.2@2862.7,2597.84 ; 2862.7,2193.95 U4.2@2862.7,2597.84 ; U4.2@2887.7,2622.84 U4.2@2862.7,2597.84
  other v1: 2937.5,356.25
NetC2_1: C2.1 R19.1 | length 80
  Bottom Layer w45: 2396.55,2012.5 2396.55,2025 2402.18,2025 C2.1
NetC2_2: C2.2 D5.1 T1.6 T1.7 | length 555.2
  Bottom Layer w50: T1.7@2123.62,2371.95 C2.2@2475.75,2371.95
  Bottom Layer w80: T1.6 T1.7 T1.7@2123.62,2371.95
NetC7_1: C7.1 L1.2 NTC1.1 | length 445.1
  Bottom Layer w80: L1.2 459.65,1363.29 C7.1 631.25,1525 NTC1.1
NetC7_2: C7.2 D7.1 D13.2 L1.4 | length 649.2
  Bottom Layer w60: D7.1 D13.2@268.16,1712.5
  Bottom Layer w75: D7.1@140.95,1710.5 D7.1
  Bottom Layer w80: D7.1@140.95,1710.5 65.95,1635.5 C7.2 65.95,1456.99 L1.4
NetC8_1: C8.1 R22.1 R23.1 | length 288.2
  Bottom Layer w60: R22.1 R23.1 C8.1@589.13,2868.75
NetC8_2: C8.2 D9.2 D11.2 | length 491.1
  Bottom Layer w60: D9.2 D11.2 952.9,2794.25 C8.2
NetD1_1: D1.1 R10.2 | length 105
  Bottom Layer w15: R10.2 D1.1@5259.65,1837.5
NetD2_1: D2.1 R14.2 | length 105
  Bottom Layer w30: R14.2@5465.9,1732.5 D2.1
NetD3_1: D3.1 R15.2 | length 105
  Bottom Layer w15: R15.2@4847.15,1732.5 D3.1
NetD4_1: D4.1 R17.2 | length 105
  Bottom Layer w50: R17.2 D4.1
NetD6_1: D6.1 D12.2 NTC1.2 | length 552.7
  Bottom Layer w40: D12.2 597.15,2056.25 669,1984.4 NTC1.2
  Bottom Layer w60: D6.1 D12.2
NetD8_1: D8.1 T1.9 T1.10 | length 364.1
  Bottom Layer w70: T1.10 D8.1@2290.9,2956.25
  Bottom Layer w80: T1.9 T1.10
NetD9_1: D9.1 R20.1 R21.1 | length 306
  Bottom Layer w40: R20.1@407.15,2551.25 R21.1 ; R20.1 D9.1
NetD10_1: D10.1 R29.1 | length 111.8
  Bottom Layer w30: D10.1 1256.25,1900 1260.94,1904.69 R29.1@1260.94,1910.16
NetD14_2: D14.2 R30.2 R31.1 | length 190.1
  Bottom Layer w40: R31.1 957.5,1775 R30.2
NetQ1_1: Q1.1 R36.1 R38.2 R39.2 | length 955.4
  Bottom Layer w40: Q1.1 2154.04,1004.04 2212.5,1062.5 2352.15,1062.5 R36.1 2359.65,1109.65 2392.75,1142.75 R39.2 R38.2
NetQ2_1: Q2.1 R37.1 R40.2 R41.2 | length 948.1
  Bottom Layer w40: Q2.1 3479.04,991.54 3550,1062.5 3677.15,1062.5 R37.1 3684.65,1109.65 3717.75,1142.75 R41.2 R40.2
NetQ3_1: Q3.1 R42.1 R44.2 | length 189.1
  Bottom Layer w40: Q3.1 R44.2@3786.29,522.1
NetQ4_1: Q4.1 R43.1 R45.2 | length 191.8
  Bottom Layer w40: Q4.1 2461.29,522.1 R45.2@2463.14,520.25
NetQ5_1: Q5.1 R46.1 R48.2 R49.2 | length 535.6
  Bottom Layer w40: R48.2 R49.2 2625,770.25 2750,895.25 2750,958.4 R46.1
NetQ6_1: Q6.1 R47.1 R50.2 R51.2 | length 535.6
  Bottom Layer w40: R51.2@3790.9,770.25 R50.2 3950,770.25 4075,895.25 4075,958.4 R47.1@3978.4,1055
NetQ7_1: Q7.1 R52.1 R54.2 | length 656.3
  Bottom Layer w40: R54.2@2544.39,520.25 R54.2 2544.39,430.61 2593.75,381.25 2840.9,381.25 2872.15,412.5 R52.1 2870.55,521.85 2775,521.85
NetQ8_1: Q8.1 R53.1 R55.2 | length 545.2
  Bottom Layer w40: R55.2@3869.39,520.25 3869.39,468.11 3906.25,431.25 4108.15,431.25 R53.1 4195.55,521.85 Q8.1
NetR1_2: R1.2 S1.12 | length 165.1
  Bottom Layer w15: R1.2@4953.4,2606.25 4959.65,2612.5 S1.12
NetR2_2: R2.2 S1.11 | length 176.9
  Bottom Layer w15: S1.11 5059.65,2594.06 R2.2
NetR3_1: R3.1 S1.2 | length 119.4
  Bottom Layer w15: R3.1 5031.25,3070 5043.12,3081.88 5043.12,3124.38 5059.65,3140.9 S1.2
NetR4_2: R4.2 S1.10 | length 182.6
  Bottom Layer w15: S1.10 5159.65,2607.85 R4.2
NetR5_1: R5.1 S1.3 | length 105
  Bottom Layer w15: R5.1@5159.65,3063.75 S1.3
NetR6_2: R6.2 S1.9 | length 189.1
  Bottom Layer w15: S1.9 5281.25,2747.15 5281.25,2606.25 R6.2@5293.75,2593.75
NetR7_2: R7.2 S1.8 | length 200.7
  Bottom Layer w15: S1.8 5359.65,2652.85 5409.65,2602.85 R7.2
NetR8_1: R8.1 S1.6 | length 105
  Bottom Layer w15: R8.1 S1.6
NetR27_1: R27.1 R28.2 | length 158.7
  Bottom Layer w40: R27.1 R28.2
NetR29_2: R29.2 T1.5 | length 206.9
  Bottom Layer w30: R29.2@1254.32,2024.13 T1.5@1400.59,2170.4
NetR32_1: R32.1 R34.2 | length 754.3
  Bottom Layer w40: R34.2 1445,1667.5 1481.25,1631.25 1675,1631.25 1731.25,1687.5 1731.25,1744.73 1729.65,1746.34 R32.1@1729.65,2065.35
NULL: C9.2 L1.3 P3.2 VR1.1 | length 748
  Bottom Layer w130: P3.2 VR1.1 C9.2 L1.3
P_7SEG_A: P1.3 R3.2 U1.15 | length 1912.1
  Bottom Layer w15: P1.3@3531.25,2725 3575,2681.25 3725,2681.25 ; U1.15 3725,2520.19 3725,2681.25 ; R3.2 3842.5,2973.75 3725,2856.25 3725,2681.25
P_7SEG_B: R8.2 U1.17 | length 2035.5
  Bottom Layer w15: U1.17 3785.98,2798.48 3912.5,2925 5068.75,2925 5117.5,2973.75 R8.2
P_7SEG_C: P1.4 R6.1 U1.16 | length 2351.4
  Top Layer w15: P1.4 v1@3762.5,2825 ; v1(4093.75,2712.5) 3804.73,2712.5 3760.98,2756.25 3760.98,2823.48 v1@3762.5,2825 ; v1@3762.5,2825 v1@3768.75,2831.25 ; v1@3768.75,2831.25 3775,2837.5 v1(3768.75,2837.5) v1@3768.75,2831.25
  Top Layer w40: v1(3768.75,2837.5) v1@3775,2843.75 ; v1@4087.5,2712.5 v1@4093.75,2706.25
  Bottom Layer w15: U1.16 3760.98,2829.73 v1(3768.75,2837.5) ; v1(4093.75,2712.5) 4100,2712.5 4215.62,2596.88 4485.18,2596.88 4544.56,2537.5 5250,2537.5 5288.75,2498.75 R6.1
  Bottom Layer w40: v1(3768.75,2837.5) v1@3775,2843.75 ; v1@4087.5,2712.5 v1@4093.75,2706.25
  other v2: 3637.5,2850
P_7SEG_COM_1: S1.1 U1.26 | length 1564.8
  Top Layer w15: v1(3993.75,2762.5) 3993.75,3053.03 4109.47,3168.75 v2(4306.25,3168.75)
  Bottom Layer w15: v1(3993.75,2762.5) 4010.98,2745.27 U1.26 ; v2(4306.25,3168.75) S1.1
P_7SEG_COM_2: S1.4 U1.25 | length 2025.2
  Top Layer w15: v1(3925,2762.5) 3925,3081.25 4081.25,3237.5 v2(4150,3237.5)
  Bottom Layer w15: v1(3925,2762.5) 3985.98,2701.52 U1.25 ; v2(4150,3237.5) 5190.9,3237.5 S1.4
P_7SEG_COM_3: S1.5 U1.24 | length 2287.2
  Top Layer w15: v1(3875,2762.5) 3875,3100 4062.5,3287.5 v2(4356.25,3287.5)
  Bottom Layer w15: v1(3875,2762.5) 3960.98,2676.52 U1.24 ; v2(4356.25,3287.5) 5325,3287.5 5359.65,3252.85 S1.5
P_7SEG_COM_4: S1.7 U1.23 | length 2272.8
  Top Layer w15: v1(4162.5,2450) 4162.5,2800 4231.25,2868.75 5418.75,2868.75 5459.65,2827.85 S1.7 5459.65,2659.1 v1(5462.5,2656.25)
  Bottom Layer w15: U1.23 3935.98,2460.24 3952.48,2443.75 4156.25,2443.75 v1(4162.5,2450) ; S1.7 5459.65,2659.1 v1(5462.5,2656.25)
  Bottom Layer w40: v1@4150,2456.25 v1@4156.25,2450
P_7SEG_D: R2.1 U1.11 | length 1370.4
  Bottom Layer w15: U1.11 3810.98,2314.02 3906.97,2410 5013.71,2410 R2.1
P_7SEG_DOT: R4.1 U1.28 | length 1174.4
  Bottom Layer w15: U1.28 4108.03,2556.25 4490.45,2556.25 4537.5,2509.2 5123.3,2509.2 R4.1
P_7SEG_E: R1.1 U1.10 | length 1308.9
  Top Layer w15: v1(4250,2375) v1(4250,2450)
  Top Layer w40: v1@4243.75,2368.75 v1@4250,2362.5 ; v1@4243.75,2456.25 v1(4250,2450)
  Bottom Layer w15: U1.10 3835.98,2302.26 3908.73,2375 v1(4250,2375) ; v1(4250,2450) 4927.15,2450 4933.4,2443.75 R1.1
  Bottom Layer w40: v1@4243.75,2368.75 v1@4250,2362.5 ; v1@4243.75,2456.25 v1(4250,2450)
P_7SEG_F: R5.2 U1.18 | length 1647.7
  Bottom Layer w15: U1.18 3810.98,2785.98 3925,2900 R5.2@5134.65,2900
P_7SEG_G: R7.1 U1.27 | length 2324.9
  Bottom Layer w15: U1.27 4035.98,2735.98 4075,2775 4318.75,2775 4375,2831.25 5562.5,2831.25 5593.75,2800 5593.75,2525 5562.5,2493.75 R7.1@5393.75,2493.75
P_KEY_1: R9.1 S2.1 U1.1 | length 1967.7
  Bottom Layer w15: U1.1 4067.69,2260 5582.62,2260 5729.04,2113.58 S2.1@5965.26,2113.58
P_KEY_2: R13.1 S3.1 U1.2 | length 2855
  Bottom Layer w15: U1.2 4035.98,2101.52 4075,2062.5 4218.75,2062.5 4391.25,2235 5490,2235 5576.25,2148.75 5576.25,1542.5 5663.58,1455.17 5729.04,1455.17 5837.31,1455.17 5847.15,1445.32 5955.42,1445.32 S3.1@5965.26,1455.17
P_KEY_3: R16.1 S4.1 U1.3@4010.98,2253.3 | length 963.5
  Bottom Layer w15: U1.3@4010.98,2253.3 4010.98,1995.27 4043.75,1962.5 R16.1 4187.5,1962.5 4338.58,2113.58 4404.04,2113.58 S4.1@4640.26,2113.58
P_KEY_4: R18.1 S5.1 U1.4 | length 1334.5
  Bottom Layer w15: U1.4 3985.98,1876.52 3987.5,1875 R18.1 3951.25,1780 4276.08,1455.17 4404.83,1455.17 S5.1@4641.05,1455.17
P_LED_1: R10.1 U1.5 | length 1895.7
  Top Layer w15: v1(4418.75,2300) 4656.25,2300 v1(4850,2106.25)
  Top Layer w60: v1@4412.5,2312.5 v1@4418.75,2312.5
  Bottom Layer w15: U1.5 3960.98,2302.26 3972.83,2314.1 4074.14,2314.1 4088.24,2300 v1(4418.75,2300) ; v1(4850,2106.25) 5087.5,2106.25 5156.25,2037.5 5156.25,1675 5188.75,1642.5 R10.1
  Bottom Layer w60: 4381.25,2312.5 v1@4418.75,2312.5 ; v1@4843.75,2112.5 v1(4850,2106.25)
P_LED_2: R14.1 U1.6 | length 2201.1
  Top Layer w15: v1(4481.25,2368.75) 4700,2368.75 4906.25,2162.5 4912.5,2162.5 v1(4918.75,2162.5)
  Top Layer w60: v1@4481.25,2362.5 v1@4487.5,2356.25 ; v1@4906.25,2168.75 v1@4912.5,2162.5
  Bottom Layer w15: U1.6 3935.98,2312.61 3962.47,2339.1 4084.49,2339.1 4098.6,2325 4300,2325 4350,2375 4475,2375 v1(4481.25,2368.75) ; v1(4918.75,2162.5) 5256.25,2162.5 5368.75,2050 5368.75,1681.25 5407.5,1642.5 R14.1
  Bottom Layer w60: v1@4481.25,2362.5 4509.65,2362.5 ; v1@4906.25,2168.75 v1@4912.5,2162.5
P_LED_3: R15.1 U1.22 | length 3096.7
  Top Layer w15: v1(3918.75,2625) 3662.5,2625 3612.5,2575 3612.5,1410.36 3635.03,1387.82 4803.72,1387.82 4843.75,1427.85 v1(4843.75,1500)
  Top Layer w40: v1@3912.5,2631.25 v1(3918.75,2625)
  Top Layer w60: v1@4837.5,1500 v1@4843.75,1493.75
  Bottom Layer w15: U1.22 3910.98,2585.98 3910.98,2617.23 v1(3918.75,2625) ; v1(4843.75,1500) 4843.75,1616.6 R15.1
  Bottom Layer w40: v1@3912.5,2631.25 v1(3918.75,2625)
  Bottom Layer w60: v1@4837.5,1500 v1@4843.75,1493.75
P_LED_4: R17.1 U1.21 | length 3447.3
  Top Layer w15: v1(3862.5,2675) 3856.25,2681.25 3668.75,2681.25 3587.5,2600 3587.5,1400 3625,1362.5 4984.65,1362.5 5053.4,1431.25 v1@5053.4,1477.85
  Top Layer w40: v1@3856.25,2668.75 v1(3862.5,2675)
  Top Layer w60: v1@5037.5,1493.75 v1@5053.4,1477.85
  Bottom Layer w15: v1(3862.5,2675) 3875,2662.5 3875,2569.15 3885.98,2558.16 U1.21 ; v1(5053.4,1487.5) R17.1
  Bottom Layer w40: v1@3856.25,2668.75 v1(3862.5,2675)
  Bottom Layer w60: v1@5043.75,1487.5 v1@5050,1481.25
P_STEPM1: R43.2 U1.14 | length 2711.4
  Top Layer w15: v1(2362.5,793.75) 2579.56,793.75 2687.5,901.69 2687.5,1612.5 2970.77,1895.77 2970.77,2095.77 3043.75,2168.75 v1(3462.5,2168.75)
  Top Layer w40: v1@3462.5,2175 v1@3468.75,2168.75
  Top Layer w60: v1@2365.62,790.62 v1@2371.88,784.38
  Bottom Layer w15: R43.2 2362.5,658.1 v1(2362.5,793.75) ; v1(3462.5,2168.75) 3550,2168.75 3581.25,2200 3725,2200 3735.98,2210.98 U1.14
  Bottom Layer w40: v1@3462.5,2175 v1@3468.75,2168.75
  Bottom Layer w60: v1(2362.5,793.75) v1@2368.75,787.5
P_STEPM2: R52.2 U1.13 | length 2529.3
  Top Layer w15: v1(2712.5,762.5) 2712.5,1602.14 2995.77,1885.41 2995.77,2067.91 3044.11,2116.25 3458.75,2116.25 v1(3462.5,2112.5)
  Top Layer w40: v1(2712.5,762.5) v1@2718.75,756.25 ; v1(3462.5,2112.5) v1@3468.75,2106.25
  Bottom Layer w15: v1(2712.5,762.5) 2819.75,655.25 R52.2 ; v1(3462.5,2112.5) 3543.75,2112.5 3600,2168.75 3729.11,2168.75 3760.98,2200.63 U1.13
  Bottom Layer w40: v1@3462.5,2110 v1@3468.75,2103.75
P_STEPM3: R42.2 U1.19 | length 4551.7
  Top Layer w15: v1(3368.75,2081.25) 3056.25,2081.25 3020.77,2045.77 3020.77,1875.06 2906.25,1760.54 2906.25,1506.25 3231.25,1181.25 4318.75,1181.25 4431.25,1068.75 4431.25,968.75 4252.17,789.67 3727.17,789.67 v1(3687.5,750)
  Top Layer w40: v1@3362.5,2075 v1@3368.75,2068.75 ; v1@3681.25,756.25 v1(3687.5,750)
  Bottom Layer w15: v1(3368.75,2081.25) 3368.75,2318.75 3450,2400 3806.25,2400 3835.98,2429.73 U1.19 ; R42.2 3684.65,747.15 v1(3687.5,750)
  Bottom Layer w40: v1@3362.5,2075 v1@3368.75,2068.75
  Bottom Layer w60: v1@3681.25,756.25 v1(3687.5,750)
P_STEPM4: R53.2 U1.20 | length 4372.6
  Top Layer w15: v1(3406.25,2031.25) 3073.43,2031.25 3045.77,2003.59 3045.77,1864.7 2931.25,1750.18 2931.25,1516.61 3241.61,1206.25 4329.11,1206.25 4456.25,1079.11 4456.25,958.39 4247.86,750 v1(4025,750)
  Top Layer w40: v1@3412.5,2025 3418.75,2018.75 ; v1@4018.75,750 v1@4025,743.75
  Bottom Layer w15: v1(3406.25,2031.25) 3406.25,2320.89 3458.21,2372.86 3814.46,2372.86 3860.98,2419.38 U1.20 ; v1(4025,750) 4031.25,750 4126,655.25 R53.2
  Bottom Layer w40: v1@3412.5,2025 3418.75,2018.75
  Bottom Layer w60: v1@4018.75,750 v1@4025,743.75
PHASE: C9.1 F1.2 L1.1 VR1.2 | length 1118.4
  Bottom Layer w150: VR1.2 626.13,629.68 C9.1 882.04,787.16 882.04,994.85 731.93,994.85 711.28,1015.5 L1.1
PHASE_IN: F1.1 P3.1 | length 555.5
  Bottom Layer w150: P3.1 874.51,267.47 ; F1.1@882.04,178.49 F1.1@882.04,387.15
PI2C_SCK: P2.2 R12.1 U1.7 | length 1058
  Top Layer w15: P2.2 3711.69,1644.56 3711.69,2066.88 3738.56,2093.75 3862.5,2093.75 3931.25,2162.5 v1(3937.5,2168.75)
  Bottom Layer w15: R12.1 3812.5,1636.25 P2.2 ; U1.7 3910.98,2195.27 v1(3937.5,2168.75)
  Bottom Layer w40: v1@3931.25,2162.5 v1(3937.5,2168.75)
PI2C_SDA: P2.1 R11.1 U1.8 | length 995.7
  Top Layer w15: P2.1 3686.69,1569.56 3686.69,2077.24 3728.21,2118.75 3838,2118.75 v1(3875.5,2156.25)
  Top Layer w40: v1@3869.25,2156.25 v1@3875.5,2162.5
  Bottom Layer w15: P2.1 3712.5,1470 R11.1 ; v1(3875.5,2156.25) 3885.98,2166.73 U1.8
  Bottom Layer w40: v1@3869.25,2156.25 v1@3875.5,2162.5
STEPM1: D20.1 D22.2 P6.3 Q5.3 Q7.3 R38.1 R39.1 | length 1391.5
  Top Layer w40: v1(3133.07,381.25) v1(3133.07,543.75)
  Bottom Layer w40: Q7.3@2700.59,636.02 2720.84,615.77 2772.02,615.77 2800.05,587.75 2953.4,587.75 D22.2 ; Q5.3@2825.59,801.48 2895.42,801.48 D20.1 D22.2 ; Q5.3@2825.59,907.78 2825.59,998.69 R39.1 R38.1 ; P6.3 v1(3133.07,381.25) ; v1(3133.07,543.75) 3133.07,560.68 3081,612.75 D22.2
  Bottom Layer w60: v1@3118.75,550 v1@3125,543.75
STEPM2: D16.1 D19.2 P6.4 Q1.3 Q4.3 R48.1 R49.1 | length 2046.2
  Bottom Layer w30: D19.2 D16.1 2202.57,812.25 2213.09,801.73 2261.37,850 2465.9,850 ; R48.1 2465.9,850 ; R49.1 2559.65,850 2465.9,850
  Bottom Layer w40: D19.2 2130.13,636.27 Q4.3@2213.09,636.27 ; Q4.3@2212.5,543.75 2212.5,481.25 2637.5,56.25 2981.25,56.25 3034.65,109.65 P6.4
STEPM3: D21.1 D23.2 P6.2 Q6.3 Q8.3 R40.1 R41.1 | length 2540.6
  Bottom Layer w40: P6.2 3231.5,87.12 3268.62,50 4212.5,50 4400,237.5 4400,525 4312.25,612.75 D23.2 ; Q8.3@4025.59,636.02 4045.84,615.77 4097.02,615.77 4125.05,587.75 4278.4,587.75 D23.2 ; Q6.3@4150.59,801.48 4220.42,801.48 D21.1 D23.2 ; Q6.3@4150.59,907.78 4150.59,998.69 R41.1 R40.1
STEPM4: D17.1 D18.2 P6.1 Q2.3 Q3.3 R50.1 R51.1 | length 1584.7
  Top Layer w40: v1(3275,631.25) 3275,431.25 3329.92,376.33 v1(3329.92,362.5)
  Bottom Layer w40: v1(3275,631.25) 3350.5,706.75 D18.2 ; P6.1 v1(3329.92,362.5) ; Q3.3@3538.09,636.27 3455.13,636.27 D18.2 ; R51.1@3790.9,905.25 3790.9,831.25 ; R50.1 3884.65,853.4 3862.5,831.25 3790.9,831.25 ; D18.2 D17.1 3527.57,812.25 3538.09,801.73 3567.62,831.25 3790.9,831.25
V8: C15.1 J2.2 P5.1 U4.1 | length 475.2
  Bottom Layer w45: P5.1 J2.2 2697.15,2884.65 ; C15.1@2649.97,2690.33 2697.15,2737.5 2697.15,2884.65 ; U4.1@2784.65,2884.65 2697.15,2884.65
V8_IN: C10.1 C11.1 D8.2 J2.1 | length 337
  Bottom Layer w45: C10.1 J2.1
  Bottom Layer w60: D8.2@2290.9,2780.75 C10.1@2521.65,2780.75
V24: C18.1 D16.2 D17.2 D20.2 D21.2 J1.2 P4.1 P6.7 Q1.2 Q2.2 Q5.2 Q6.2 R36.2 R37.2 R46.2 R47.2 | length 7380.2
  Top Layer w45: v2@1825,1150 1909.65,1065.35 v1(2059.65,1065.35) 2187.5,1065.35 2273.03,979.82 v1(2279.82,979.82) 2279.82,757.54 2317.37,720 2530,720 2739.37,510.63 v1(2739.37,325) ; 2756.39,506.25 2912.5,506.25 3250,843.75 v1(3250,981.25) 3603.4,981.25 v1(3604.82,979.82) 3606.25,981.25 4331.25,981.25 v1(4343.75,993.75)
  Bottom Layer w45: v2(1812.5,1162.5) 1812.5,1331.25 2056.25,1575 2925,1575 3012.5,1662.5 P4.1 J1.2@3012.5,1786.25 ; D16.2 v1(2059.65,1065.35) ; Q1.2 2272.15,972.15 v1(2279.82,979.82) 2287.5,987.5 2356.25,987.5 ; R36.2 2359.65,984.1 2356.25,987.5 ; R46.2 2653.4,965.35 2631.25,987.5 2356.25,987.5 ; P6.7 v1(2739.37,325) ; Q5.2 2956.75,915.65 D20.2 3072.15,987.75 D17.2@3350.25,987.75 ; C18.1 3020.55,1786.25 ; v1(3250,981.25) 3343.75,981.25 D17.2@3350.25,987.75 ; D17.2 D17.2@3350.25,987.75 ; Q2.2 3597.15,972.15 v1(3604.82,979.82) 3612.5,987.5 3681.25,987.5 ; R37.2 3684.65,984.1 3681.25,987.5 ; R47.2@3978.4,920 3978.4,965.35 3956.25,987.5 3681.25,987.5 ; Q6.2 D21.2@4281.75,915.65 ; D21.2 4343.75,934.35 4343.75,987.5 v1(4343.75,993.75) ; J1.2@3012.5,1786.25 2970,1786.25 2968.75,1787.5 J1.2 3021.79,1787.5 3020.55,1786.25 ; J1.2@3012.5,1786.25 3020.55,1786.25
  Bottom Layer w60: v1@4337.5,993.75 v1@4343.75,987.5
V24_IN: C4.1 C5.1 D5.2 J1.1 R19.2 R24.1 R25.1 R26.1 R33.2 | length 1396.3
  Bottom Layer w60: R33.2 2205,1961.25 2267.18,2023.43 D5.2@2267.18,2201 ; D5.2@2310.93,2207.25 2455.25,2207.25 2557.5,2105 C4.1 2643.75,2082.5 R24.1 C5.1@2856.25,1963.75 ; J1.1@2896.23,1787.7 2862.5,1821.43 C5.1 2862.5,1957.5 C5.1@2856.25,1963.75 ; R26.1 3059.55,1963.75 C5.1@2856.25,1963.75
VCC: C1.1 C16.1 C17.1 P1.2 P2.3 R9.2 R11.2 R12.2 R13.2 R16.2 R18.2 U1.9 U4.3 | length 3829.9
  Top Layer w15: v1(3687.5,2506.25) 3687.5,2375 3700,2362.5 3806.25,2362.5 3860.98,2307.77 3860.98,2204.73 v1(3818.75,2162.5) ; v1(3950,2118.75) 3987.5,2156.25 v1(4075,2156.25)
  Top Layer w40: v1@3681.25,2512.5 v1(3687.5,2506.25) ; v1@3812.5,2162.5 v1@3818.75,2156.25 ; 3934.06,2103.43 v1@3940.31,2109.68 ; v1(4075,2156.25) v1@4081.25,2150
  Bottom Layer w15: C1.1 3845,2100 3818.75,2126.25 3818.75,2156.25 v1(3818.75,2162.5) 3848.74,2192.49 3849.14,2192.49 3859.39,2202.74 3859.39,2203.14 3860.98,2204.73 U1.9 ; C1.1@3870,2061.25 R13.2@3932.5,2061.25 ; R16.2 R13.2@3932.5,2061.25 ; R13.2@3943.75,2050 R13.2@3932.5,2061.25 ; v1(3950,2118.75) 3950,2080 R13.2 R13.2@3932.5,2061.25 ; v1(4075,2156.25) 4138.75,2156.25 R9.2
  Bottom Layer w30: U4.3@2978.25,2884.65 3037.5,2884.65 3065.9,2856.25 3072.15,2850 C16.1@3155.9,2850 ; C16.1 3216.25,2846.25 3306.25,2756.25 3306.25,2031.25 3375,1962.5 3843.75,1962.5 ; P1.2@3531.25,2625 3537.5,2618.75 3625,2618.75 3687.5,2556.25 v1(3687.5,2506.25) ; C1.1@3856.25,2062.3 3856.25,1975 3843.75,1962.5 ; R11.2 3912.5,1482.5 P2.3 3912.5,1637.5 3861.25,1688.75 R18.2 3843.75,1892.5 3843.75,1962.5
  Bottom Layer w40: C17.1 C17.1@3065.9,2856.25 ; v1@3675,2512.5 v1@3681.25,2506.25 ; v1@3812.5,2162.5 v1@3818.75,2156.25 ; 3927.81,2097.18 3934.06,2103.43 ; v1(4075,2156.25) v1@4081.25,2150
VFB: R33.1 R35.2 U3.1 | length 208.8
  Bottom Layer w30: U3.1 2053.4,1831.25 R33.1@2143.4,1831.25
VFB_2: D15.2 R35.1 U3.2 | length 386.6
  Bottom Layer w30: U3.2@1944.65,1921.25 R35.1 2055.9,1906.25 D15.2
pads on no net: C1.0 C4.0 C11.0 C13.0 C14.0 C15.0 C16.0 C18.0 D5.0 D6.0 D7.0 D8.0 D9.0 D10.0 D11.0 D12.0 D13.0 D14.0 D15.0 D16.0 D17.0 D18.0 D19.0 D20.0 D21.0 D22.0 D23.0 Q1.0 Q2.0 Q3.0 Q4.0 Q5.0 Q6.0 Q7.0 Q8.0 R1.0 R2.0 R3.0 R4.0 R5.0 R6.0 R7.0 R8.0 R9.0 R10.0 R11.0 R12.0 R13.0 R14.0 R15.0 R16.0 R17.0 R18.0 R19.0 R20.0 R21.0 R22.0 R23.0 R24.0 R25.0 R26.0 R27.0 R28.0 R29.0 R30.0 R31.0 R32.0 R33.0 R34.0 R35.0 R36.0 R37.0 R38.0 R39.0 R40.0 R41.0 R42.0 R43.0 R44.0 R45.0 R46.0 R47.0 R48.0 R49.0 R50.0 R51.0 R52.0 R53.0 R54.0 R55.0 U1.0 U1.3@3809.47,2381.25 U1.3@3898.48,2381.25 U1.3@3987.5,2381.25 U4.0

## Keep-outs
Keep-Out Layer:
  lines w10: 0,0 0,3331.25 966.45,3331.25 6181.25,3331.25 6181.25,0 0,0

## Other copper
Top Layer:
  text "Programming" at 3531.25,2925 h60 r90
  text "Module" at 3962.5,1443.75 h60
  text "TESTER_REMOTE_CONTROLLER_01" at 4812.5,587.5 h70
  text "PARLAR" at 4812.5,143.75 h250

## Text inside footprints (layer, text, board x,y; h text height)
C5: Top Overlay "+" at 3195.9,1802.42 h60 r180
C6: Top Overlay "+" at 151.95,2038.45 h78.74 r90
C10: Top Overlay "+" at 2296.05,2846.15 h50
C12: Top Overlay "+" at 1102.61,1805.45 h40 r270
C17: Top Overlay "+" at 2897.95,2916.69 h40